# EAGLE board Servo_update (EAGLE 9.6.2)
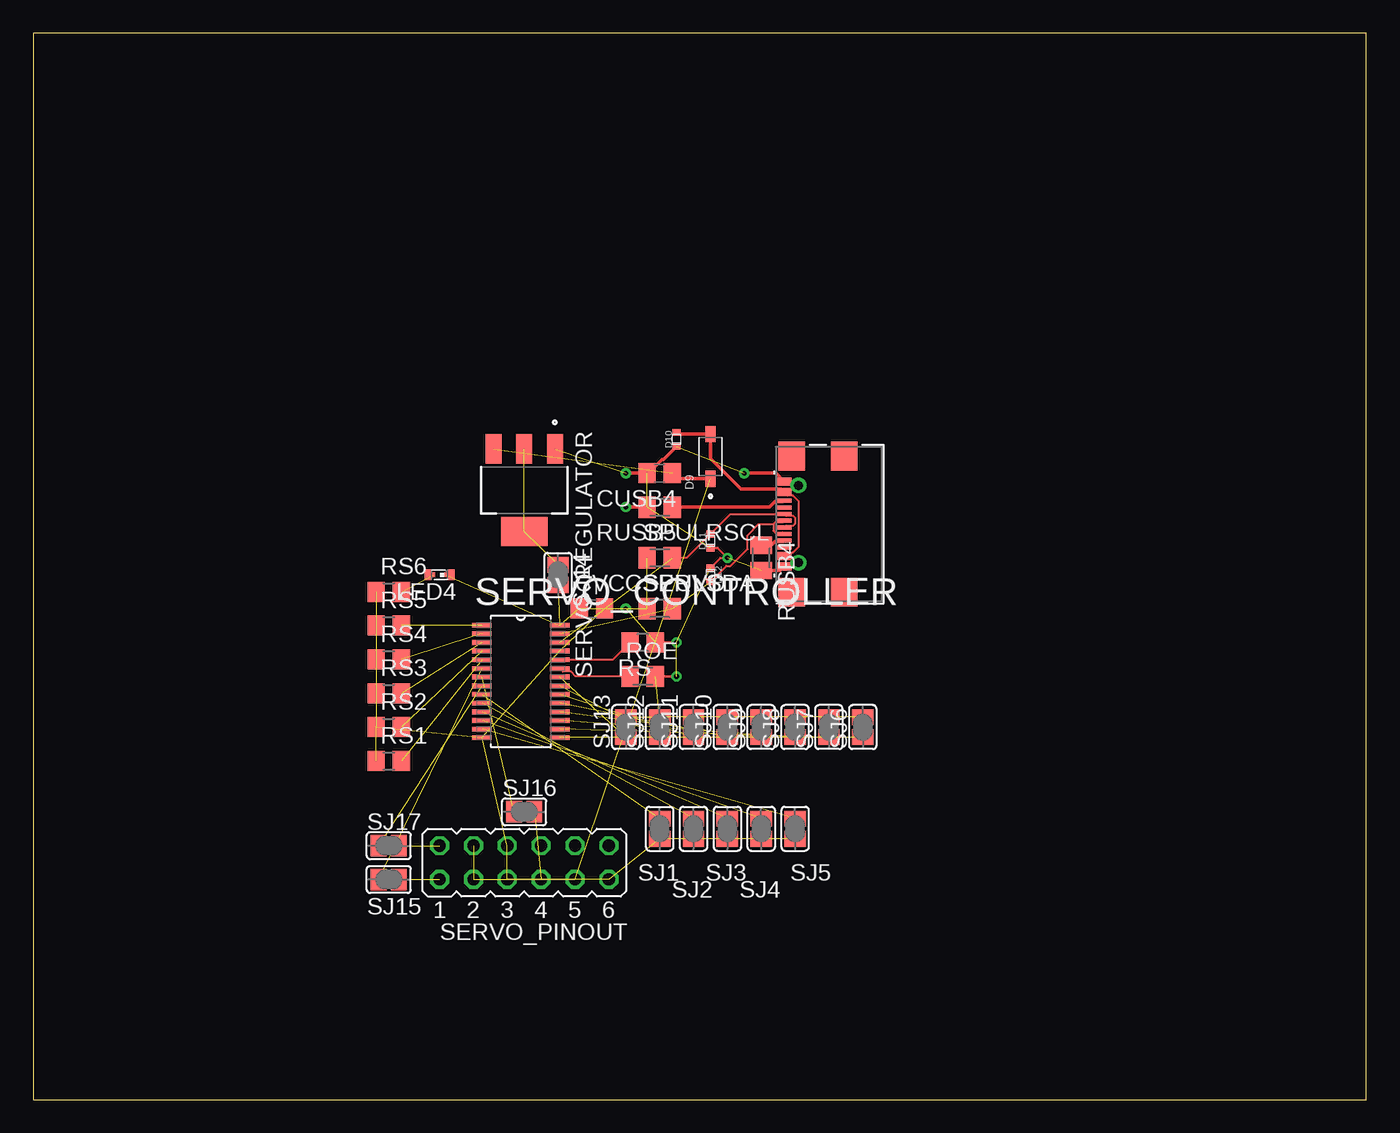
[diagram p0: board, top side]

Size 100 x 80 mm. Coordinates in mm from the lower left corner, seen from the top.
Outline: 0,0 100,0 100,80 0,80 0,0
Copper layers (1*16): Top 0.035mm / dielectric 1.5mm / Bottom 0.035mm
Design rules "default": minimum track width 6mil, minimum drill 0.35mm, track to track 6mil, track to pad 6mil, pad to pad 6mil, via to via 6mil, smd to smd 6mil, copper to edge 40mil, drill to drill 6mil, minimum pad ring 10mil, minimum via ring 8mil, stop-mask expansion 4mil, vias tented up to drill 0mil, thermal gap 10mil

## Footprints (pad centres in the part's own frame; a part is rotated, then mirrored left to right if it is on the bottom)
C0805 = smd 1.3 x 1.5: 1 -0.95,0; 2 0.95,0
SOD3715X145N = smd 1.21 x 0.73: A 1.68,0; C -1.68,0
MBTB-D-SOD-923F-IMP-0402 = smd 0.5 x 0.6: 1 -0.525,0; 2 0.525,0
USB4110-GF-A_GCT = drill 0.66 pad 0.66: 13 -2.896,2.286; 14 2.896,2.286 | smd 2.159 x 2.007: 15 -5.11,2.788; 16 5.11,2.788; 17 -5.11,-1.142; 18 5.11,-1.142 | smd 0.61 x 1.143: A1-B12 -3.2,3.363; A4-B9 -2.4,3.363; A9-B4 2.4,3.363; A12-B1 3.2,3.363 | smd 0.305 x 1.143: A5 -1.25,3.363; A6 -0.25,3.363; A7 0.25,3.363; A8 1.25,3.363; B5 1.75,3.363; B6 0.75,3.363; B7 -0.75,3.363; B8 -1.75,3.363
SMARTLED-TTW = smd 0.8 x 0.5: A 0,-0.875; C 0,0.875 | smd 0.35 x 0.35: A@1 0,-0.5; C@1 0,0.5
M0805 = smd 1.3 x 1.6: 1 -0.95,0; 2 0.95,0
R0805 = smd 1.3 x 1.5: 1 -0.95,0; 2 0.95,0
SOP65P640X110-28N = smd 1.473 x 0.356: 1 -2.921,4.216; 2 -2.921,3.581; 3 -2.921,2.921; 4 -2.921,2.286; 5 -2.921,1.626; 6 -2.921,0.965; 7 -2.921,0.33; 8 -2.921,-0.33; 9 -2.921,-0.965; 10 -2.921,-1.626; 11 -2.921,-2.286; 12 -2.921,-2.921; 13 -2.921,-3.581; 14 -2.921,-4.216; 15 2.921,-4.216; 16 2.921,-3.581; 17 2.921,-2.921; 18 2.921,-2.286; 19 2.921,-1.626; 20 2.921,-0.965; 21 2.921,-0.33; 22 2.921,0.33; 23 2.921,0.965; 24 2.921,1.626; 25 2.921,2.286; 26 2.921,2.921; 27 2.921,3.581; 28 2.921,4.216
JP6Q = drill 0.914 octagon: 1 -6.35,-1.27; 2 -6.35,1.27; 3 -3.81,-1.27; 4 -3.81,1.27; 5 -1.27,-1.27; 6 -1.27,1.27; 7 1.27,-1.27; 8 1.27,1.27; 9 3.81,-1.27; 10 3.81,1.27; 11 6.35,-1.27; 12 6.35,1.27
SOT230P700X185-4N = smd 2.2 x 1.2: 1 -3.1,2.3; 2 -3.1,0; 3 -3.1,-2.3 | smd 2.2 x 3.5: 4 3.1,0
SJ = smd 1.168 x 1.6: 1 -0.762,0; 2 0.762,0

## Placement (x,y rotation side)
CUSB4  10uF  [C0805]  46.99,46.99 180 top
CVCCSERVO  10uF  [C0805]  41.91,36.83 0 top
D9  1N5819HW-7-F  [SOD3715X145N]  50.8,48.26 90 top
D10  CPDQ5V0-HF  [MBTB-D-SOD-923F-IMP-0402]  48.26,49.53 90 top
D11  CPDQ5V0-HF  [MBTB-D-SOD-923F-IMP-0402]  50.8,41.91 90 top
D12  CPDQ5V0-HF  [MBTB-D-SOD-923F-IMP-0402]  50.8,39.37 270 top
I2C_USBC_OUT  USB4110-GF-A  [USB4110-GF-A_GCT]  59.69,43.18 90 top
LED4  [SMARTLED-TTW]  30.48,39.37 90 top
ROE  10k  [M0805]  45.72,31.75 0 top
RS  10k  [R0805]  45.72,34.29 180 top
RS1  10k  [R0805]  26.67,25.4 0 top
RS2  10k  [R0805]  26.67,27.94 0 top
RS3  10k  [R0805]  26.67,30.48 0 top
RS4  10k  [R0805]  26.67,33.02 0 top
RS5  10k  [R0805]  26.67,35.56 0 top
RS6  2.2k  [R0805]  26.67,38.1 0 top
RUSB4  5.1k  [M0805]  54.61,40.64 270 top
RUSB5  5.1k  [M0805]  46.99,44.45 180 top
SERVO_CONTROLLER  PCA9685PW,112  [SOP65P640X110-28N]  36.58,31.37 0 top
SERVO_PINOUT  [JP6Q]  36.83,17.78 0 top
SERVO_REGULATOR  AZ1117IH-3.3TRG1  [SOT230P700X185-4N]  36.83,45.72 270 top
SJ1  [SJ]  46.99,20.32 270 top
SJ2  [SJ]  49.53,20.32 270 top
SJ3  [SJ]  52.07,20.32 270 top
SJ4  [SJ]  54.61,20.32 270 top
SJ5  [SJ]  57.15,20.32 270 top
SJ6  [SJ]  62.23,27.94 90 top
SJ7  [SJ]  59.69,27.94 90 top
SJ8  [SJ]  57.15,27.94 90 top
SJ9  [SJ]  54.61,27.94 90 top
SJ10  [SJ]  52.07,27.94 90 top
SJ11  [SJ]  49.53,27.94 90 top
SJ12  [SJ]  46.99,27.94 90 top
SJ13  [SJ]  44.45,27.94 90 top
SJ14  [SJ]  39.37,39.37 270 top
SJ15  [SJ]  26.67,16.51 0 top
SJ16  [SJ]  36.83,21.59 0 top
SJ17  [SJ]  26.67,19.05 0 top
SPULRSCL  10k  [M0805]  46.99,40.64 0 top
SPULSDA  10k  [M0805]  46.99,36.83 0 top

## Library data of the parts
CUSB4 CVCCSERVO = rcl; SPICEPREFIX: C
D9 = 1N5819HW-7-F; AVAILABILITY: In Stock; CHECK_PRICES: https://www.snapeda.com/parts/1N5819HW-7-F/Diodes+Inc./view-part/?ref=eda; DESCRIPTION: Diode Schottky 1A 40V SOD123 | Diodes Inc 1N5819HW-7-F; MF: Diodes Inc.; MP: 1N5819HW-7-F; PACKAGE: SOD-123 Fairchild Semiconductor; PRICE: None; PURCHASE-URL: https://www.snapeda.com/api/url_track_click_mouser/?unipart_id=42272&manufacturer=Diodes Inc.&part_name=1N5819HW-7-F&search_term=1n5819hw-7-f; SNAPEDA_LINK: https://www.snapeda.com/parts/1N5819HW-7-F/Diodes+Inc./view-part/?ref=snap
D10-D12 = CPDQ5V0-HF; AVAILABILITY: In Stock; CHECK_PRICES: https://www.snapeda.com/parts/CPDQ5V0-HF/Comchip+Technology/view-part/?ref=eda; DESCRIPTION: 18.6V Clamp 9.4A (8/20µs) Ipp Tvs Diode Surface Mount 0402/SOD-923F; MF: Comchip Technology; MP: CPDQ5V0-HF; PACKAGE: 0402 Comchip; PRICE: None; PURCHASE-URL: https://www.snapeda.com/api/url_track_click_mouser/?unipart_id=809934&manufacturer=Comchip Technology&part_name=CPDQ5V0-HF&search_term=cpdq5v0-hf; SNAPEDA_LINK: https://www.snapeda.com/parts/CPDQ5V0-HF/Comchip+Technology/view-part/?ref=snap
I2C_USBC_OUT = USB4110-GF-A; COPYRIGHT: Copyright (C) 2023 Ultra Librarian. All rights reserved.; MANUFACTURER_PART_NUMBER: USB4110-GF-A; MFR_NAME: Global Connector Technology
LED4 = adafruit
ROE RS RS1-RS6 RUSB4 RUSB5 SPULRSCL SPULSDA = rcl; SPICEPREFIX: R
SERVO_CONTROLLER = PCA9685PW_112; AVAILABILITY: In Stock; CHECK_PRICES: https://www.snapeda.com/parts/PCA9685PW,112/NXP+USA+Inc./view-part/?ref=eda; DESCRIPTION: LED Driver IC 16 Output Linear - PWM Dimming 25mA 28-TSSOP; MF: NXP USA; MP: PCA9685PW,112; PACKAGE: TSSOP-28 NXP Semiconductors; PRICE: None; PURCHASE-URL: https://pricing.snapeda.com/search?q=PCA9685PW,112&ref=eda; SNAPEDA_LINK: https://www.snapeda.com/parts/PCA9685PW,112/NXP+USA+Inc./view-part/?ref=snap
SERVO_PINOUT SJ1-SJ17 = jumper
SERVO_REGULATOR = AZ1117IH-3.3TRG1; AVAILABILITY: In Stock; CHECK_PRICES: https://www.snapeda.com/parts/AZ1117IH-3.3TRG1/Diodes+Inc./view-part/?ref=eda; DESCRIPTION: Linear Voltage Regulator IC Positive Fixed 1 Output 1A SOT-223-3; MF: Diodes Inc.; MP: AZ1117IH-3.3TRG1; PACKAGE: SOT-223 Diodes Inc.; PRICE: None; PURCHASE-URL: https://www.snapeda.com/api/url_track_click_mouser/?unipart_id=490259&manufacturer=Diodes Inc.&part_name=AZ1117IH-3.3TRG1&search_term=az1117ih-3.3trg1; SNAPEDA_LINK: https://www.snapeda.com/parts/AZ1117IH-3.3TRG1/Diodes+Inc./view-part/?ref=snap

## Nets
3.3VOUTUSB1: CVCCSERVO.1 LED4.A@1 SERVO_CONTROLLER.28 SJ14.2 SPULRSCL.1 SPULSDA.1
3V3VREGOUT: SERVO_REGULATOR.2 SERVO_REGULATOR.4 SJ14.1
5VOUTUSB12: CUSB4.1 D9.C SERVO_PINOUT.3 SERVO_PINOUT.4 SERVO_PINOUT.9 SERVO_REGULATOR.3
A0: RS5.2 SERVO_CONTROLLER.1
A1: RS4.2 SERVO_CONTROLLER.2
A2: RS3.2 SERVO_CONTROLLER.3
A3: RS2.2 SERVO_CONTROLLER.4
A4: RS1.2 SERVO_CONTROLLER.5
A5: RS.2 SERVO_CONTROLLER.24
CC1_RUSB4: I2C_USBC_OUT.A5 RUSB4.1
CC2: I2C_USBC_OUT.B5 RUSB5.1
GND: CUSB4.2 CVCCSERVO.2 D10.1 D11.1 D12.1 I2C_USBC_OUT.A1-B12 I2C_USBC_OUT.A12-B1 ROE.2 RS1.1 RS2.1 RS3.1 RS4.1 RS5.1 RS6.1 RS.1 RUSB4.2 RUSB5.2 SERVO_CONTROLLER.14 SERVO_CONTROLLER.25 SERVO_PINOUT.5 SERVO_PINOUT.6 SERVO_PINOUT.11 SERVO_REGULATOR.1 SJ1.2 SJ2.2 SJ3.2 SJ4.2 SJ5.2 SJ6.2 SJ7.2 SJ8.2 SJ9.2 SJ10.2 SJ11.2 SJ12.2 SJ13.2
LED_RS6: LED4.C@1 RS6.2
N$1: SERVO_CONTROLLER.9 SJ1.1
N$2: SERVO_CONTROLLER.10 SJ2.1
N$3: SERVO_CONTROLLER.11 SJ3.1
N$4: SERVO_CONTROLLER.12 SJ4.1
N$5: SERVO_CONTROLLER.13 SJ5.1
N$6: SERVO_CONTROLLER.15 SJ6.1
N$7: SERVO_CONTROLLER.16 SJ7.1
N$8: SERVO_CONTROLLER.18 SJ9.1
N$9: SERVO_CONTROLLER.19 SJ10.1
N$10: SERVO_CONTROLLER.20 SJ11.1
N$11: SERVO_CONTROLLER.21 SJ12.1
N$12: SERVO_CONTROLLER.17 SJ8.1
N$13: SERVO_CONTROLLER.22 SJ13.1
N$14: SERVO_CONTROLLER.6 SJ15.1
N$15: SERVO_CONTROLLER.7 SJ16.1
N$16: SERVO_CONTROLLER.8 SJ17.1
OE: ROE.1 SERVO_CONTROLLER.23
PWM1: SERVO_PINOUT.1 SJ15.2
PWM2: SERVO_PINOUT.7 SJ16.2
PWM3: SERVO_PINOUT.2 SJ17.2
SRVSCLM: D11.2 I2C_USBC_OUT.A6 I2C_USBC_OUT.B6 SERVO_CONTROLLER.26 SPULRSCL.2
SRVSDAM: D12.2 I2C_USBC_OUT.A7 I2C_USBC_OUT.B7 SERVO_CONTROLLER.27 SPULSDA.2
VBUS12: D9.A D10.2 I2C_USBC_OUT.A4-B9 I2C_USBC_OUT.A9-B4

## Tracks (layer width: path | path; a pad name or v marks a point on that pad's centre or on a via)
3.3VOUTUSB1  (5 unrouted)
3V3VREGOUT  (2 unrouted)
5VOUTUSB12  (4 unrouted)
  Top 0.254: D9.C 48.35,46.58 CUSB4.1
A0  (1 unrouted)
A1  (1 unrouted)
A2  (1 unrouted)
A3  (1 unrouted)
A4  (1 unrouted)
A5
  Top 0.152: RS.2 43.48,32.99 SERVO_CONTROLLER.24
CC1_RUSB4
  Top 0.254: I2C_USBC_OUT.A5 56.26,41.86 55.64,41.86 55.37,41.59 RUSB4.1
CC2
  Top 0.254: I2C_USBC_OUT.B5 56.26,44.86 55.64,44.86 55.23,44.45 RUSB5.1
GND  (via drill 0.35)  (33 unrouted)
  Top 0.152: D12.1 51.55,40.64 v52.07,40.64
  Top 0.203: v48.26,31.75 ROE.2 | v48.26,34.29 RS.1 | v52.07,40.64 51.33,41.38 D11.1
  Top 0.254: I2C_USBC_OUT.A1-B12 | I2C_USBC_OUT.A1-B12 56.15,39.8 | I2C_USBC_OUT.A12-B1 55.72,46.99 v53.34,46.99 | RUSB4.2 56.04,39.69 I2C_USBC_OUT.A1-B12 | v44.45,46.99 CUSB4.2 46.15,46.99 47.17,48.02 47.27,48.02 D10.1 | RUSB5.2 v44.45,44.45
  other vias: 44.45,36.83
LED_RS6  (1 unrouted)
N$1  (1 unrouted)
N$2  (1 unrouted)
N$3  (1 unrouted)
N$4  (1 unrouted)
N$5  (1 unrouted)
N$6  (1 unrouted)
N$7  (1 unrouted)
N$8  (1 unrouted)
N$9  (1 unrouted)
N$10  (1 unrouted)
N$11  (1 unrouted)
N$12  (1 unrouted)
N$13  (1 unrouted)
N$14  (1 unrouted)
N$15  (1 unrouted)
N$16  (1 unrouted)
OE
  Top 0.152: SERVO_CONTROLLER.23 39.73,32.11 40.33,32.11 40.68,31.75 ROE.1
PWM1  (1 unrouted)
PWM2  (1 unrouted)
PWM3  (1 unrouted)
SRVSCLM  (1 unrouted)
  Top 0.152: SPULRSCL.2 49.01,40.64 D11.2 52.3,43.93 I2C_USBC_OUT.B6 56.45,43.81 56.99,43.81 57.13,43.68 57.13,43.18 56.99,43.05 56.45,43.05 I2C_USBC_OUT.A6
SRVSDAM  (2 unrouted)
  Top 0.152: 55.53,43.18 55.66,43.31 56.21,43.31 I2C_USBC_OUT.A7 | 55.53,43.18 55.53,42.68 55.66,42.55 56.21,42.55 I2C_USBC_OUT.B7 | D12.2 51.99,40.03 52.32,40.03 53.58,41.29 53.58,42.34 54.42,43.18 55.53,43.18
VBUS12
  Top 0.152: I2C_USBC_OUT.A4-B9 56.6,41.05 56.99,41.05 57.43,41.49 57.43,44.87 56.99,45.31 56.6,45.31 I2C_USBC_OUT.A9-B4
  Top 0.254: D10.2 48.38,49.94 D9.A 50.8,48.1 53.1,45.8 56.11,45.8 I2C_USBC_OUT.A9-B4